# EAGLE board robotpin (EAGLE 7.7.0)
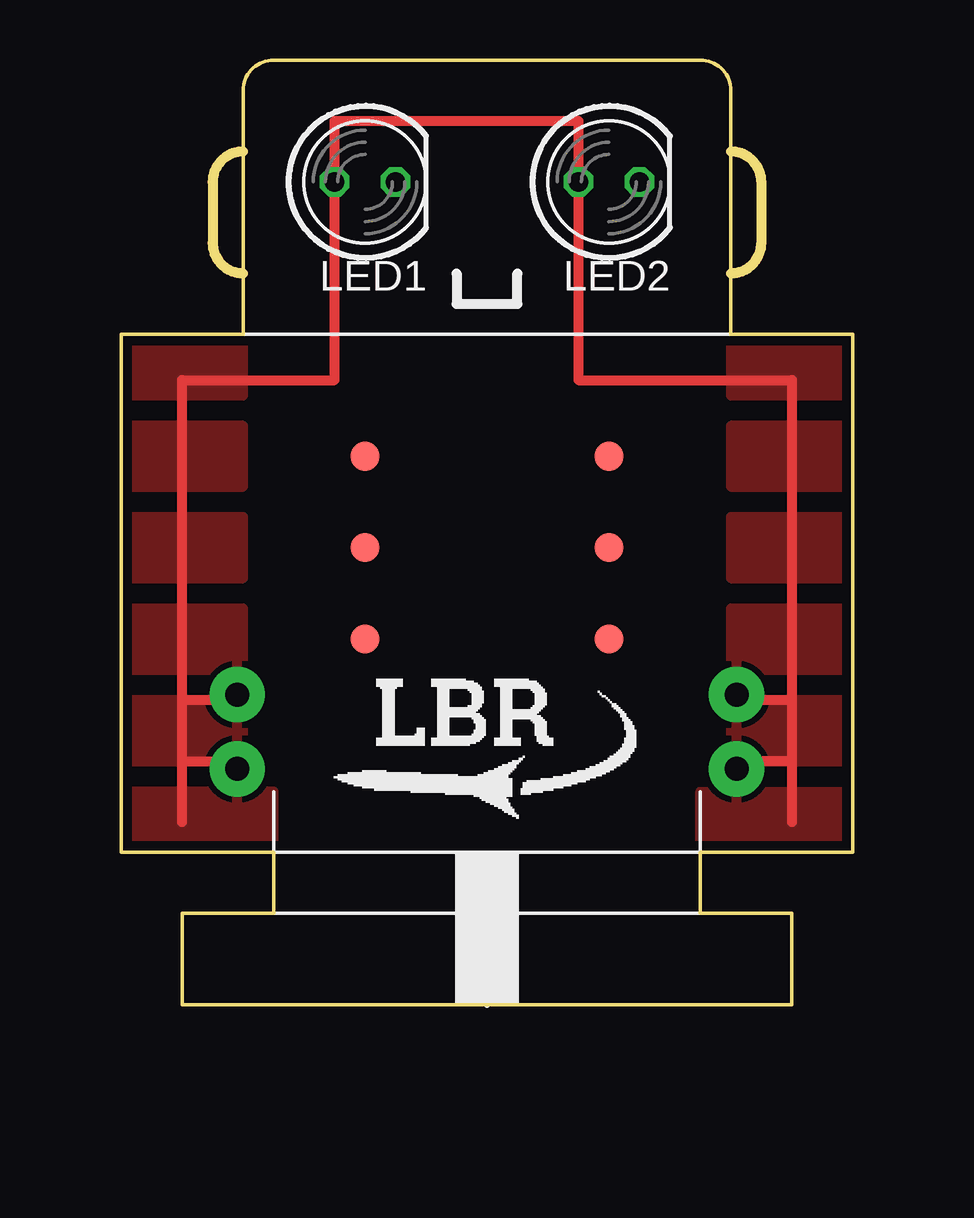
[diagram p0: board, top side]
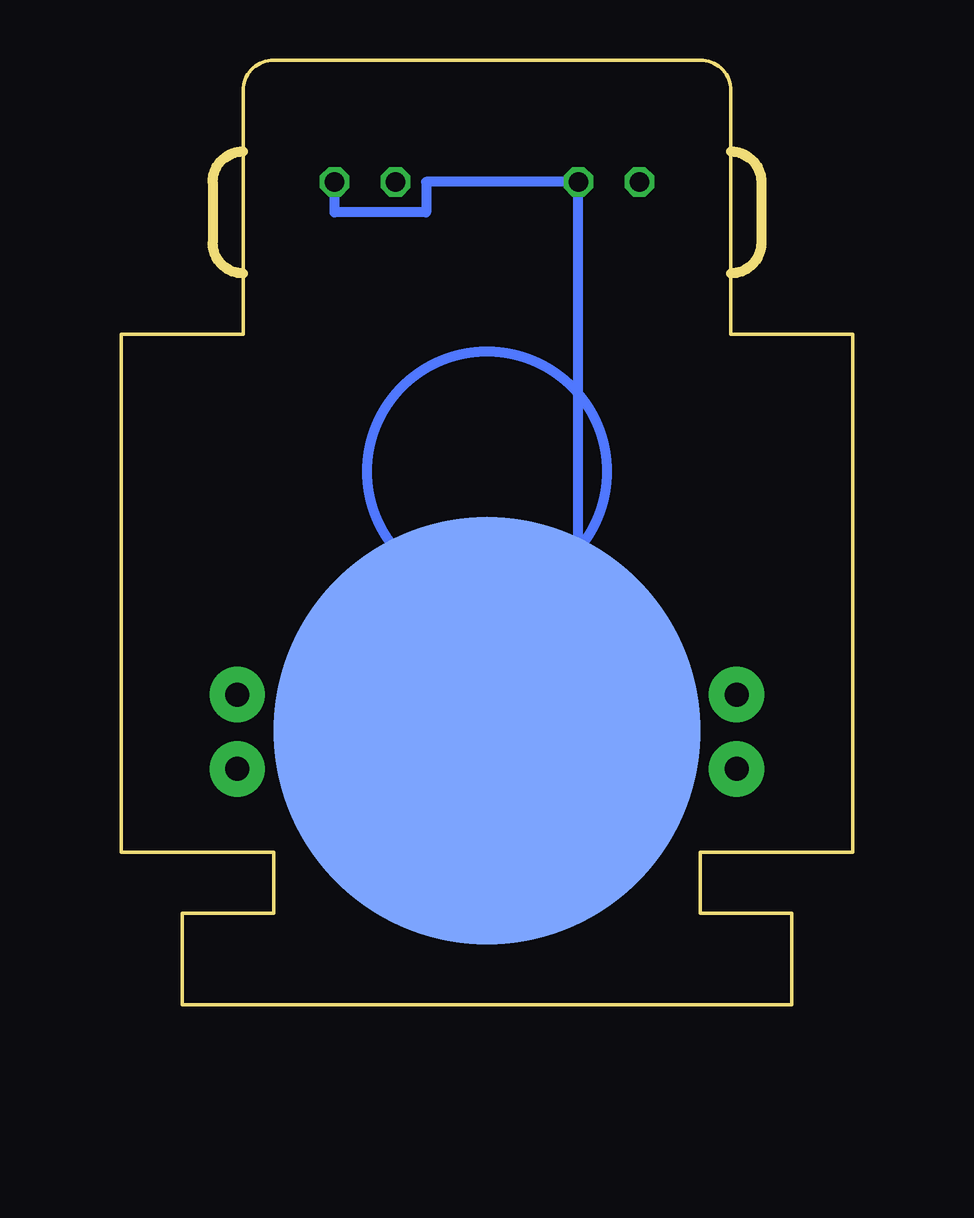
[diagram p1: board, bottom side, seen from below]

Size 30.48 x 39.37 mm. Coordinates in mm from the lower left corner, seen from the top.
Outline: 5.08,30.48 5.08,27.94 0,27.94 0,6.35 6.35,6.35 6.35,3.81 2.54,3.81 2.54,0 27.94,0 27.94,3.81 24.13,3.81 24.13,6.35 30.48,6.35 30.48,27.94 25.4,27.94 25.4,30.48
Outline: 5.08,30.48 5.08,35.56
Outline: 5.08,35.56 5.08,38.1 arc-90 6.35,39.37 24.13,39.37 arc-90 25.4,38.1 25.4,35.56
Outline: 25.4,35.56 25.4,30.48
Outline: 5.08,35.56 arc90 3.81,34.29 3.81,31.75 arc90 5.08,30.48
Outline: 25.4,35.56 arc-90 26.67,34.29 26.67,31.75 arc-90 25.4,30.48
Copper layers (1*16): Top 0.0356mm / dielectric 1.5011mm / Bottom 0.0356mm
Design rules "LaenPCBOrder": minimum track width 6mil, minimum drill 13mil, track to track 6mil, track to pad 6mil, pad to pad 6mil, via to via 6mil, smd to smd 6mil, copper to edge 15mil, drill to drill 6mil, minimum pad ring 7mil, minimum via ring 7mil, stop-mask expansion 3mil, vias tented up to drill 0mil, thermal gap 10mil

## Footprints (pad centres in the part's own frame; a part is rotated, then mirrored left to right if it is on the bottom)
BAT-HLD-001-THM = drill 1 pad 2.3: P$1 10.4,1.5; P$2 10.4,-1.6; P$3 -10.4,1.5; P$4 -10.4,-1.6 | smd 17.8 x 17.8: P$5 0,0
LED5MM = drill 0.813 octagon: A -1.27,0; K 1.27,0
TP12R = smd 1.2 x 1.2: TP 0,0

## Placement (x,y rotation side)
BATTERY  CR2032-GK  [BAT-HLD-001-THM]  15.24,11.43 0 bottom
LED1  [LED5MM]  20.32,34.29 0 top
LED2  [LED5MM]  10.16,34.29 0 top
TP1  PTR1TP12R  [TP12R]  10.16,19.05 0 top
TP2  PTR1TP12R  [TP12R]  10.16,22.86 0 top
TP3  PTR1TP12R  [TP12R]  10.16,15.24 0 top
TP7  PTR1TP12R  [TP12R]  20.32,19.05 0 top
TP8  PTR1TP12R  [TP12R]  20.32,22.86 0 top
TP9  PTR1TP12R  [TP12R]  20.32,15.24 0 top
U$2  [LOGO-0.50"]  8.89,7.62 0 top

## Library data of the parts
BATTERY = battery
LED1 LED2 = led
TP1-TP3 TP7-TP9 = testpad
U$2 = LBR Logo

## Nets
N$1: BATTERY.P$1 BATTERY.P$2 BATTERY.P$3 BATTERY.P$4 LED1.A LED2.A
N$2: BATTERY.P$5 LED1.K LED2.K

## Tracks (layer width: path | path; a pad name or v marks a point on that pad's centre or on a via)
N$1
  Top 0.406: 2.54,7.62 2.54,10.16 | 2.54,10.16 2.54,12.7 | 2.54,12.7 2.54,26.03 8.89,26.03 LED2.A 8.89,36.83 19.05,36.83 LED1.A 19.05,26.03 27.94,26.03 27.94,12.7 | 2.54,10.16 5.08,10.16 | 5.08,12.7 2.54,12.7 | 27.94,12.7 27.94,10.16 | 27.94,10.16 27.94,7.62 | 27.94,10.16 25.4,10.16 | 27.94,12.7 25.4,12.7
  pour Top: 0,17.78 5.08,17.78 5.08,20.32 0,20.32
  pour Top: 0,13.97 5.08,13.97 5.08,16.51 0,16.51
  pour Top: 0,10.16 5.08,10.16 5.08,12.7 0,12.7
  pour Top: 0,6.35 6.35,6.35 6.35,8.89 0,8.89
  pour Top: 0,21.59 5.08,21.59 5.08,24.13 0,24.13
  pour Top: 0,25.4 5.08,25.4 5.08,27.94 0,27.94
  pour Top: 30.48,25.4 30.48,27.94 25.4,27.94 25.4,25.4
  pour Top: 30.48,21.59 30.48,24.13 25.4,24.13 25.4,21.59
  pour Top: 30.48,17.78 30.48,20.32 25.4,20.32 25.4,17.78
  pour Top: 30.48,13.97 30.48,16.51 25.4,16.51 25.4,13.97
  pour Top: 30.48,10.16 30.48,12.7 25.4,12.7 25.4,10.16
  pour Top: 24.13,6.35 24.13,8.89 30.48,8.89 30.48,6.35
N$2
  Bottom 0.406: BATTERY.P$5 11.43,11.43 LED2.K 17.78,34.29 17.78,33.02 21.59,33.02 LED1.K
(copper drawn outside any net)
  shapes: Bottom circle x1